# Altium PCB Linear Actuator V3.1_PcbDoc.PcbDoc
Units mm, origin at the board's own origin, x right, y up, seen from the top; angles counter-clockwise.
Board outline 73 x 17.08 mm, 2 copper layers (Top Layer, Bottom Layer); 50 components, 48 nets, 194 pads, 115 vias.
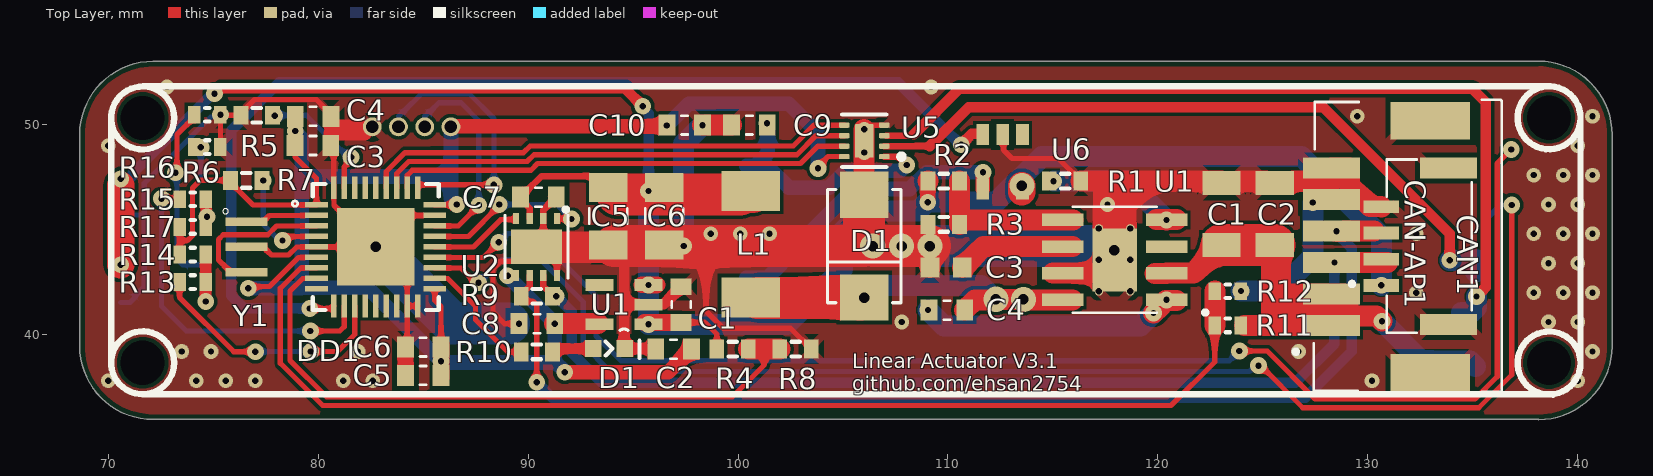
[diagram p0: Top Layer view]
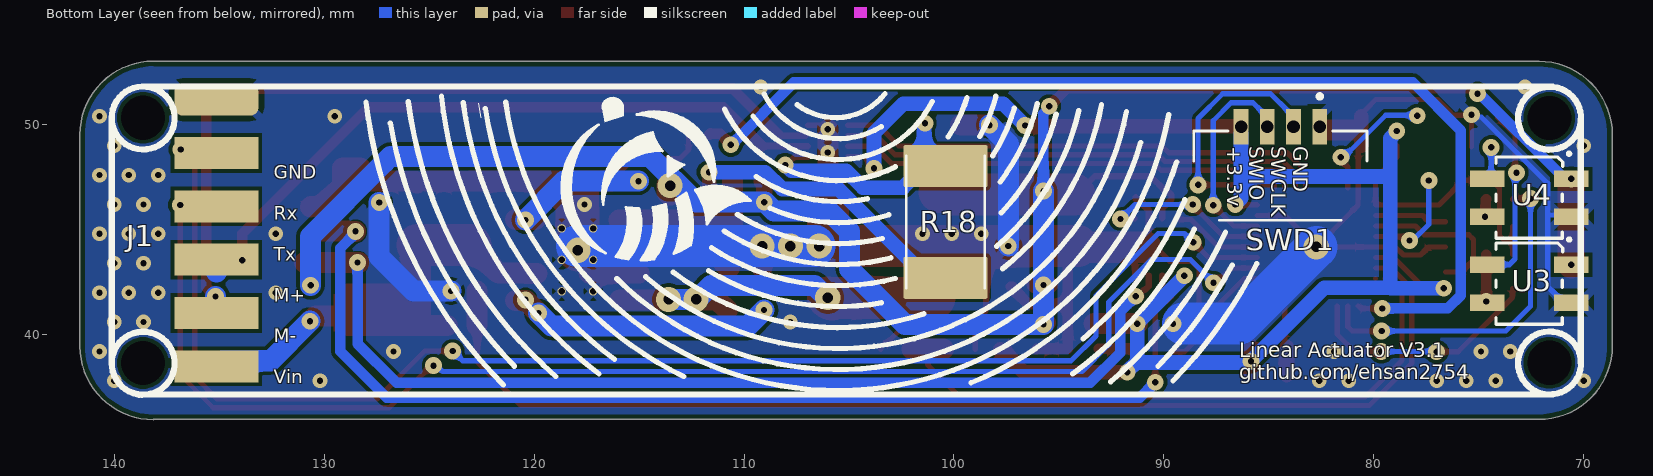
[diagram p1: Bottom Layer view, seen from below]
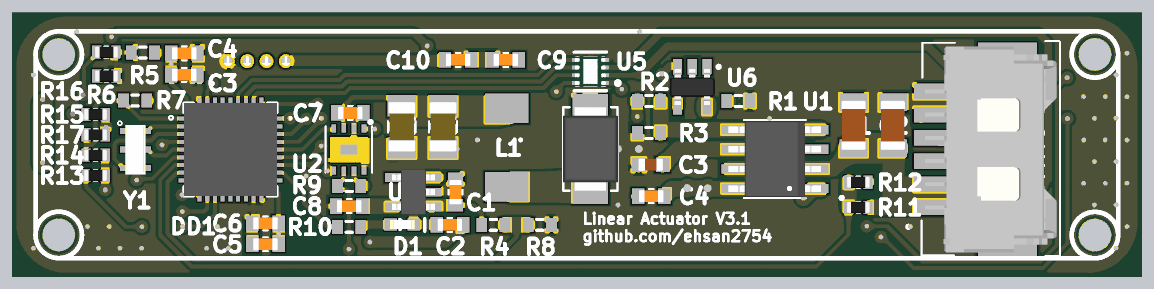
[diagram p2: 3D render of the assembled board from above, using the file's embedded part models]
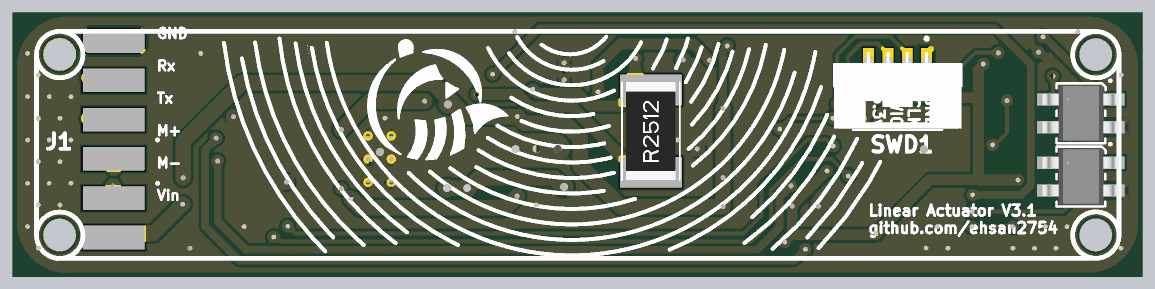
[diagram p3: 3D render of the assembled board from below, using the file's embedded part models]

## Layer stack, top to bottom
Top Solder: solder mask 0.0102, Solder Resist, Dk 3.5
Top Layer: signal copper 0.0356
Dielectric 1: dielectric 0.32, FR-4, Dk 4.8
Bottom Layer: signal copper 0.0356
Bottom Solder: solder mask 0.0102, Solder Resist, Dk 3.5

## Board outline
68.64,39.461 68.64,49.52 68.641,49.52 cw(c72.141,49.52) 72.14,53.02 138.13,53.02 138.13,53.029 cw(c138.13,49.529) 141.63,49.53 141.645,49.53 141.645,39.45 141.629,39.45 cw(c138.129,39.45) 138.13,35.95 138.13,35.96 72.14,35.96 72.14,35.961 cw(c72.14,39.461)

## Design rules (kind name [scope] priority, off if disabled: settings)
BoardOutlineClearance [All] p1: gap=0.25 ignorepadtopadclearanceinfootprint=FALSE
Clearance [All] p1: gap=0.17 ignorepadtopadclearanceinfootprint=FALSE
ComponentClearance [All] p1: gap=0.254 collisioncheckmode=3 verticalgap=2540 showdistances=FALSE
FanoutControl Fanout_SOIC [IsSOIC] p3: bgadir=Out bgaviamode=Closest fanoutstyle=Auto fanoutdirection=Alternating viagrid=0.025 // Fanout_SOIC (Default Rule)
FanoutControl Fanout_Small [(CompPinCount < 5)] p4: bgadir=Out bgaviamode=Closest fanoutstyle=Auto fanoutdirection=OutThenIn viagrid=0.025 // Fanout_Small (Default Rule)
FanoutControl Fanout_Default [All] p5: bgadir=In bgaviamode=Closest fanoutstyle=Auto fanoutdirection=Alternating viagrid=0.025 // Fanout_Default (Default Rule)
HoleSize [All] p1: absolutevalues=TRUE maxlimit=4.5 minlimit=0.3 maxpercent=80.000 minpercent=20.000
HoleToHoleClearance [All] p1: gap=0.4 allowstackedmicrovias=TRUE
MinimumSolderMaskSliver [All] p1: minsoldermaskwidth=0.15
PlaneClearance [All] p1: clearance=0.2
PlaneConnect [All] p1: planeconnectstyle=Relief reliefexpansion=0.5 reliefentries=4 reliefconductorwidth=0.2 reliefairgap=0.25
PolygonConnect PolygonConnect_1 [InNet('GND')] p1: connectstyle=Relief reliefconductorwidth=0.4 reliefentries=4 polygonreliefangle="45 Angle" airgapwidth=0.254
PolygonConnect [All] p2: connectstyle=Relief reliefconductorwidth=0.3 reliefentries=4 polygonreliefangle="90 Angle" airgapwidth=0.16
RoutingCorners [All] p1: cornerstyle=45-Degree minsetback=2.5 maxsetback=2.5
RoutingPriority [All] p1 off: routingpriority=0
RoutingVias [All] p1: holewidth=0.3 width=0.7 viastyle="Through Hole" minholewidth=0.3 minwidth=0.7 maxholewidth=0.8 maxwidth=1.2
SilkToSilkClearance [All] p1: silktosilkclearance=0
SilkToSolderMaskClearance [IsPad] p1: minsilkscreentomaskgap=0 clearancetoexposedcopper=TRUE
SolderMaskExpansion [All] p1: expansion=0.1 istentingtop=FALSE
Width [All] p1: maxlimit=5 minlimit=0.17 preferedwidth=0.3
17 further rules are at their usual default settings.

## Classes and differential pairs
component class "Linear Actuator V3.1_SchDoc": C9 C10 J1 R6 R13 R14 R15 R16 R17 R18 U3 U4 U5 U6
component class STM32F103T8: C1 C2 C3 C4 C5 C6 C7 C8 CAN1 CAN-AP1 D1 DD1 R4 R5 R7 R8 R9 R10 R11 R12 SWD1 U1 U2 Y1
component class DCDC-LMR16030: C1 C2 C3 C4 C5 C6 D1 L1 R1 R2 R3 U1

## Components (designator, comment, footprint, x,y, rotation, side; value= is the part's Value field where it differs from the comment)
C1 "GX035C104MAT2-500" *CAPC1608X90 97.29,41.43 r90 top value=0.1u
C1 "GRM31CR71H225KA88L" *CAP3216X125N 123.029,45.747 r90 top value=2.2u
C2 "GX035C104MAT2-500" *CAPC1608X90 96.93,39.31 r180 top value=0.1u
C2 "GRM31CR71H225KA88L" *CAP3216X125N 125.569,45.747 r90 top value=2.2u
C3 "GX035C104MAT2-500" *CAPC1608X90 79.753,49.01 r0 top value=0.1u
C3 "GRM188R71C105KA12D" CAPC1608X90N 109.913,43.199 r0 top value=1u
C4 "GX035C104MAT2-500" *CAPC1608X90 79.756,50.4 r0 top value=0.1u
C4 "GX035C104MAT2-500" *CAPC1608X90 109.948,41.167 r180 top value=0.1u
C5 "GX035C104MAT2-500" *CAPC1608X90 85.005,38.06 r180 top value=0.1u
C5 "GRM31CR61A476KE15L" *CAPC3216X125N 93.819,45.651 r90 top value=47u
C6 "GX035C104MAT2-500" *CAPC1608X90 85.005,39.41 r180 top value=0.1u
C6 "GRM31CR61A476KE15L" *CAPC3216X125N 96.486,45.651 r90 top value=47u
C7 "GX035C104MAT2-500" *CAPC1608X90 90.49,46.55 r0 top value=0.1u
C8 "GX035C104MAT2-500" *CAPC1608X90 90.417,40.52 r180 top value=0.1u
C9 "GX035C104MAT2-500" *CAPC1608X90 100.54,49.98 r180 top value=0.1u
C10 "GX035C104MAT2-500" *CAPC1608X90 97.46,49.98 r0 top value=0.1u
CAN1 "502585-0670" MOLEX_502585-0670 128.47,44.185 r90 top
CAN-AP1 "SM04B-GHS-TB(LF)(SN)-" JST_SM04B-GHS-TB(LF)(SN)- 132.919,44.217 r90 top
D1 "0603-LED-BLUE" *LEDM1608X80_LTE-C1906R-14(Primary) 93.85,39.335 r180 top
D1 "SK56" *SMB_P6SMB62AT3G(Primary) 106.011,44.217 r270 top
DD1 "STM32F103T8" *QFN50P600X600X100-37N 82.74,44.18 r0 top
J1 "PLS-6" "HDR Side 6 pin" 135.13,48.654 r270 bottom
L1 "IHLP2020BZER100M01" IHLP 100.601,44.307 r270 top
R1 "Res3" J1-0603 115.577,47.317 r180 top value=56k
R2 "Res3" J1-0603 109.798,47.317 r180 top value=56k
R3 "RC0603FR-0710KL" J1-0603 109.798,45.25 r0 top value=10k
R4 "RC0603FR-0710KL" J1-0603 99.74,39.31 r180 top value=10k
R5 "RC0603FR-0710KL" J1-0603 77.077,50.45 r0 top value=10k
R6 "330R" "RES 0603 (1608X06L)" 75.344,50.475 r180 top
R7 "RC0603FR-0710KL" J1-0603 76.577,47.35 r0 top value=10k
R8 "RC0603FR-0710KL" J1-0603 102.74,39.31 r180 top value=10k
R9 "Res3" J1-0603 90.417,41.83 r0 top value=120
R10 "Res3" J1-0603 90.417,39.18 r0 top value=330
R11 "180K" "RES 0603 (1608X06L)" 122.71,40.44 r0 top
R12 "10K" "RES 0603 (1608X06L)" 123.954,42.07 r180 top
R13 "10K" "RES 0603 (1608X06L)" 74.644,42.5 r180 top
R14 "10K" "RES 0603 (1608X06L)" 73.4,43.817 r0 top
R15 "10K" "RES 0603 (1608X06L)" 73.4,46.45 r0 top
R16 "330R" "RES 0603 (1608X06L)" 75.344,48.935 r180 top
R17 "10K" "RES 0603 (1608X06L)" 73.4,45.133 r0 top
R18 "resistor" RES2512 100.4,45.37 r90 bottom value="15mΩ ,1W"
SWD1 "BM04B-GHS-TBT(LF)(SN)(N)" JST_BM04B-GHS-holes 84.45,46.549 r180 bottom
U1 "SPX3819M5-L-3-3/TR" *SOT95P280X145-5N 94.57,41.43 r180 top value=3V3
U1 "LMR16030SDDAR" "*SOIC127P600X170-9N - duplicate" 117.937,43.561 r180 top
U2 "TJA1042" SOT782-1 90.4,44.18 r180 top
U3 "QRE1113GR" SMD4_2P90X3P60_ONS 72.6,42.43 r180 bottom
U4 "QRE1113GR" SMD4_2P90X3P60_ONS 72.6,46.52 r180 bottom
U5 "DRV8837DSGR" FP-DSG0008A-MFG 106.01,49.23 r180 top locked
U6 "ZXCT1022" SOT23-5 114.7,50.33 r180 top
Y1 "CSTCE8M00G55-R0" *OSC_CSTCE8M00G55-R0 76.59,44.18 r270 top

## Footprints (in the part's own frame and the unit in brackets; to place one, negate y for a bottom-side part, rotate by r counter-clockwise, add the part's x,y. Pads: shape width x height; smd on the part's side, far side on the other; paste and mask are expansions set on the pad)
*CAP3216X125N [mm]
  rect 1.15x1.82 smd: 1(-1.485,0) 2(1.485,0)
  body extent -1.6,-0.8 1.6,0.8, height 1.22
*CAPC1608X90 [mm]
  rect 0.8x1 smd: 1(-0.85,0) 2(0.85,0)
  silkscreen extent -0.15,-0.45 0.15,0.45, body extent -0.8,-0.4 0.8,0.41, height 0.88
*CAPC3216X125N [mm]
  rect 1.38x1.82 smd: 1(-1.369,0) 2(1.369,0)
  silkscreen extent -0.36,-0.9 0.36,0.9, body extent -1.6,-0.87 1.6,0.87, height 1.71
*LEDM1608X80_LTE-C1906R-14(Primary) [mm]
  rect 0.8x0.8 smd: A(0.75,0) C(-0.75,0)
  silkscreen extent -1.45,-0.38 0.16,0.45, body extent -0.8,-0.3 0.8,0.3, height 1.15
*OSC_CSTCE8M00G55-R0 [mm]
  rect 0.4x2 smd: 1(-1.2,0) 2(0,0) 3(1.2,0)
  silkscreen extent -1.83,-1.13 -1.57,-0.87, body extent -1.6,-0.65 1.6,0.65, height 1
*QFN50P600X600X100-37N [mm]
  rect 1.08x0.26 smd: 1(-2.815,2) 2(-2.815,1.5) 3(-2.815,1) 4(-2.815,0.5) 5(-2.815,0) 6(-2.815,-0.5) 7(-2.815,-1) 8(-2.815,-1.5) 9(-2.815,-2) 19(2.815,-2) 20(2.815,-1.5) 21(2.815,-1) 22(2.815,-0.5) 23(2.815,0) 24(2.815,0.5) 25(2.815,1) 26(2.815,1.5) 27(2.815,2)
  rect 0.26x1.08 smd: 10(-2,-2.815) 11(-1.5,-2.815) 12(-1,-2.815) 13(-0.5,-2.815) 14(0,-2.815) 15(0.5,-2.815) 16(1,-2.815) 17(1.5,-2.815) 18(2,-2.815) 28(2,2.815) 29(1.5,2.815) 30(1,2.815) 31(0.5,2.815) 32(0,2.815) 33(-0.5,2.815) 34(-1,2.815) 35(-1.5,2.815) 36(-2,2.815)
  rect 3.7x3.7 smd: 37(0,0)
  silkscreen extent -3.97,-3 3,3, body extent -3,-3 3,3, height 1
*SMB_P6SMB62AT3G(Primary) [mm]
  rect 2.2x2.3 smd: A(-2.45,0) C(2.45,0)
  silkscreen extent -2.7,-1.75 2.7,1.75, body extent -2.72,-1.78 2.72,1.78, height 2.49
"*SOIC127P600X170-9N - duplicate" [mm]
  rect 1.97x0.6 smd: 1(-2.475,1.905) 2(-2.475,0.635) 3(-2.475,-0.635) 4(-2.475,-1.905) 5(2.475,-1.905) 6(2.475,-0.635) 7(2.475,0.635) 8(2.475,1.905)
  round 0.4 hole 0.3: 9(-0.75,1.5) 9(-0.75,0) 9(-0.75,-1.5) 9(0.75,1.5) 9(0.75,0) 9(0.75,-1.5)
  rect 2.13x3 smd: 9(0,0)
  silkscreen extent -4.42,-2.52 2,2.6, body extent -3,-2.45 3,2.45, height 1.69
*SOT95P280X145-5N [mil]
  rect 52x22 smd: 1(-46,37) 2(-46,0) 3(-46,-37) 4(46,-37) 5(46,37)
  silkscreen extent -7,46 7,48, body extent -55,-57 55,57, height 57
CAPC1608X90N [mm]
  rect 0.89x0.93 smd: 1(-0.77,0) 2(0.77,0)
  body extent -0.8,-0.4 0.8,0.4, height 0.9
FP-DSG0008A-MFG [mm]
  rrect40% 0.5x0.25 smd paste+0 mask+0: 1(-0.95,0.75) 2(-0.95,0.25) 3(-0.95,-0.25) 4(-0.95,-0.75) 5(0.95,-0.75) 6(0.95,-0.25) 7(0.95,0.25) 8(0.95,0.75)
  rrect11% 0.9x1.6 smd paste-1000 mask+0: 9(0,0)
  silkscreen extent -1.9,-1.25 1.05,1.25, body extent -1.3,-1.15 1.3,1.15, height 0.25
"HDR Side 6 pin" [mm]
  rrect50% 1.524x4 smd: 1(-2.54,0)
  rect 1.524x4 smd: 2(0,0) 3(2.54,0) 4(5.08,0) 5(7.62,0) 6(10.16,0)
IHLP [mil]
  rect 75x110 smd: 1(-100,0) 2(100,0)
  body extent -100,-100 100,100, height 79
J1-0603 [mm] "Chip Resistor, Body 1.6x0.8mm, IPC High Density"
  rect 0.7x0.9 smd: 1(-0.75,0) 2(0.75,0)
  silkscreen extent -0.2,-0.35 0.2,0.35, body extent -0.85,-0.48 0.85,0.48, height 0.9
JST_BM04B-GHS-holes [mm]
  rect 0.7x1.7 / inner rect 0.6x1.7 / far side round 0.9 hole 0.6: 1(1.875,3.35) 2(0.625,3.35) 3(-0.625,3.35) 4(-1.875,3.35)
  silkscreen extent -4.13,-1.1 4.13,4.9, body extent -4.12,-1.02 4.12,3.93, height 4.15
JST_SM04B-GHS-TB(LF)(SN)- [mm]
  rect 0.6x1.7 smd: 1(-1.875,2.275) 2(-0.625,2.275) 3(0.625,2.275) 4(1.875,2.275)
  rect 1x2.7 smd: SH1(-3.725,-0.925) SH2(3.725,-0.925)
  silkscreen extent -4.13,-2.02 4.13,3.77, body extent -4.06,-2.16 4.19,2.69, height 4.35
MOLEX_502585-0670 [mm]
  rect 1x2.7 smd: 1(-3.75,0.2) 2(-2.25,0.2) 3(-0.75,0.2) 4(0.75,0.2) 5(2.25,0.2) 6(3.75,0.2)
  rect 1.8x3.8 smd: P1(-6,-4.5) P2(6,-4.5)
  silkscreen extent -6.9,-7.9 7,2, body extent -6.65,-7.68 6.65,0.82, height 6.41
RES2512 [mm]
  rrect7% 2x4 smd: 1(-2.66,0) 2(2.66,0)
  silkscreen extent -3.15,-1.87 3.15,1.87, body extent -3.17,-1.6 3.18,1.6, height 0.55
"RES 0603 (1608X06L)" [mm] "Chip Resistor, 2-Leads, Body 1.6x0.8mm, IPC High Density _ (0.063W)"
  rect 0.6x0.85 smd: 1(0,0) 2(1.244,0)
  silkscreen extent 0.52,-0.33 0.72,0.33, body extent -0.14,-0.38 1.38,0.38, height 0.45
SMD4_2P90X3P60_ONS [mm]
  rect 1.651x0.787 smd paste+0 mask+0: 1(2,0.9) 2(-2,0.9) 3(-2,-0.9) 4(2,-0.9)
  silkscreen extent -1.57,-1.93 1.98,2.18, body extent -2.47,-1.8 2.48,1.8, height 1.88
SOT23-5 [mm]
  round 0.4 on Top Overlay: 1(0.4,0.8)
  rect 0.6x1 smd: 1(1.15,0.8) 2(2.1,0.8) 3(3.05,0.8) 4(3.05,3.4) 5(1.15,3.4)
  body extent 0.64,0.93 3.56,3.27, height 1
SOT782-1 [mm]
  rect 0.3x0.525 smd: 1(-0.975,-1.362) 2(-0.325,-1.362) 3(0.325,-1.362) 4(0.975,-1.362) 5(0.975,1.362) 6(0.325,1.362) 7(-0.325,1.362) 8(-0.975,1.362)
  rect 2.45x1.65 smd paste-2: P$9(0,0)
  silkscreen extent -1.5,-1.88 1.5,1.5, body extent -1.52,-1.52 1.52,1.52, height 0.85

## Part data
C1 C2 C3 C4 C4 C5 C6 C7 C8 C9 C10: "Cap Thin Film 0.1uf 50v 0603", Package="0603 AVX", MF=AVX, Pacage Metric=1608, SnapEDA_Link=https://www.snapeda.com/parts/GX035C104MAT2-500/AVX/view-part/?ref=snap, Type=SMD
  C1 C2: MP=GX035C104MAT2-500
  C3 C4 C4 C5 C6 C7 C8 C9 C10: MP="GX035C104MAT2-500 or CL10B104JB8NNNC"
C1 C2: "1206 2.2 uF 50 V В±10% Tolerance X7R SMT Multilayer Ceramic Capacitor", Package="1206 Murata", MF="Murata Electronics", MP=GRM31CR71H225KA88L, SnapEDA_Link=https://www.snapeda.com/parts/GRM31CR71H225KA88L/Murata%20Electronics%20North%20America/view-part/?ref=snap, Type=SMD
C3: "SMD Capacitor X7R(EIA) with Capacitance: 1.0uF Tol. 10%. Rated Voltage: 16Vdc", Package=0603, ChipDip_Link=https://www.chipdip.ru/product/grm188r71c105ka12d, HelpURL=https://static.chipdip.ru/lib/428/DOC005428493.pdf, MF="Murata Electronics", MP=GRM188R71C105KA12D, Pacage Metric=1608, SnapEDA_Link=https://www.snapeda.com/parts/GRM188R71C105KA12D/Murata%20Electronics%20North%20America/view-part/228340/?ref=snap, Type=SMD
C5 C6: "Multilayer Ceramic Capacitor, GRM Series, 47 - F, - 10%, X5R, 10 V, 1206 [3216 Metric]", Package="1206 Murata Electronics", MF="Murata Electronics", MP=GRM31CR61A476KE15L, SnapEDA_Link=https://www.snapeda.com/parts/GRM31CR61A476KE15L/Murata%20Electronics%20North%20America/view-part/?ref=snap, Type=SMD
CAN1: "1.50mm Pitch, CLIK-Mate PCB Receptacle, Single Row, Surface Mount, Right-Angle, Tin Plating, Positive Lock, 6 Circuits, Natural", Package=None, MF=Molex, MP=502585-0670, SnapEDA_Link=https://www.snapeda.com/parts/502494-0670/Molex/view-part/?ref=snap, System=Connector, Type=SMD
CAN-AP1: "Connector Header Surface Mount, Right Angle 4 position 0.049 _1.25mm_", Package=None, ChipDip_Link=https://www.chipdip.ru/product/sm04b-ghs-tb-lf-sn-gh-1.25mm-header-side-ent, HelpURL=http://www.farnell.com/datasheets/2082975.pdf, MF="JST Sales", MP=SM04B-GHS-TB(LF)(SN), SnapEDA_Link=https://www.snapeda.com/parts/SM04B-GHS-TB%28LF%29%28SN%29-/JST%20Sales%20America%20Inc./view-part/2759740/?ref=snap, System=Connector
D1: library part LTE-C1906R-14, "LED IrLED Chip LED 2-Pin SMD T/R", Package="0603 Lite-On", MP=0603-LED-BLUE, SnapEDA_Link=https://www.snapeda.com/parts/LTE-C1906R-14/Lite-On%20Inc./view-part/?ref=snap, Type=SMD
D1: "Диод Шоттки 5А 60В [SMB / DO-214AA]", Package="DO-214 Littelfuse", ChipDip_Link=https://www.chipdip.ru/product/sk56, MF="Littelfuse Inc.", MP=SK56, SnapEDA_Link=https://www.snapeda.com/parts/P6SMB62AT3G/Littelfuse%20Inc./view-part/?ref=snap, Type=SMD
DD1: "STM32F103T8U6, Микроконтроллер 32BIT ARM 64K FLASH [VFQFPN-36]", Package=VFQFPN-36, ChipDip_Link=https://www.chipdip.ru/product/stm32f103t8u6-2, HelpURL=http://www.st.com/stonline/products/literature/ds/13587.pdf, MF=STM, MP=STM32F103T8U6, SnapEDA_Link=https://www.snapeda.com/parts/STM32F103T8U6TR/STMicroelectronics/view-part/?ref=search&t=STM32F103T8U6, Type=SMD
J1: "PLS-6 (DS1021-1x6), Вилка штыревая 2.54мм 1x6 прямая тип1", ChipDip_Link=https://www.chipdip.ru/product/pls-6, Instructions=DNP, MP=PLS-6, Type=SMD
L1: "10ÂµH Shielded Molded Inductor 2.3A 199mOhm Max Nonstandard", Package="Nonstandard Vishay", ChipDip_Link=https://www.chipdip.ru/product/ihlp2020bzer100m11-inductor-ihlp-smd-2020-10, HelpURL=http://www.vishay.com/docs/34253/ihlp-2020bz-01.pdf, MF="Vishay Dale", MP=IHLP2020BZER100M01, SnapEDA_Link=https://www.snapeda.com/parts/IHLP2020BZER100M01/Vishay%20Dale/view-part/44808/?ref=snap, Type=SMD
R1 R2 R10: "Resistor", Package=R0603, Pacage Metric=1608, Type=SMD
  R1 R2: ChipDip_Link=https://www.chipdip.ru/product0/9000079754, HelpURL=https://www.chipdip.ru/product0/9000079754, MP=RC0603FR-0756KL
  R10: ChipDip_Link=https://www.chipdip.ru/product0/9000079628, HelpURL=https://www.chipdip.ru/product0/9000079628, MP=RC0603FR-07330RL
R3 R4 R5 R7 R8: "10 kOhms 1 0.1 W 1 10 W Chip Resistor 0603 1608 Metric Thick Film", Package=R0603, ChipDip_Link=https://www.chipdip.ru/product0/9000079736, HelpURL=https://www.chipdip.ru/product0/9000079736, MF="Yageo or NXP", MP="10K 1% 0603", Pacage Metric=1608, SnapEDA_Link=https://www.snapeda.com/parts/RC0603FR-0710KL/Yageo/view-part/?ref=dk&t=RC0603FR-0710KL&con_ref=None, Type=SMD
R6 R11 R12 R13 R14 R15 R16 R17: library part Resistor, "Resistor", Power="1/8 W", Tolerance=5%
R9: "120 Ohms 1 0.1 W 1 10 W Chip Resistor 0603 1608 Metric Thick Film", Package=R0603, ChipDip_Link=https://www.chipdip.ru/product0/9000079618, HelpURL=https://www.chipdip.ru/product0/9000079618, MP=RC0603FR-07120RL, Pacage Metric=1608, Type=SMD
R18: "Resistor", LatestRevisionDate=17-Jul-2002, LatestRevisionNote="Re-released for DXP Platform.", PackageReference=AXIAL-0.4, Published=8-Jun-2000, Publisher="Altium Limited"
SWD1: "Conn Shrouded Header HDR 4 POS 1.25mm Solder ST SMD Reel", Package=None, Instructions="Do not install", MF="JST Sales", MP=SM04B-GHS-TB(LF)(SN), SnapEDA_Link=https://www.snapeda.com/parts/BM04B-GHS-TBT%28LF%29%28SN%29%28N%29/JST%20Sales%20America%20Inc./view-part/?ref=snap, System=Connector, Type=SMD
U1: library part SPX3819M5-L, "Low Dropout Voltage Regulator, Adjustable 0.5A, В±1%, 2.5 to 16 Vin, 5-Pin SOT-23", Package="SOT-23-5 Exar", ChipDip_Link=https://www.chipdip.ru/product1/8003455237, HelpURL=http://www.farnell.com/datasheets/2614478.pdf, MF="MaxLinear, Inc.", MP=SPX3819M5-L-3-3/TR, SnapEDA_Link=https://www.snapeda.com/parts/SPX3819M5-L/MaxLinear%2C%20Inc./view-part/?ref=snap, Type=SMD
U1: "LMR16030SDDAR, Conv DC-DC 4.3V to 60V Step Down Single-Out 1V to 50V 3A Automotive 8-Pin HSOP EP T/R", Package="PowerSOIC-8 Texas Instruments", ChipDip_Link=https://www.chipdip.ru/product1/8003448566, HelpURL=https://www.ti.com/lit/ds/symlink/lmr16030.pdf, MF="Texas Instruments", MP=LMR16030SDDAR, SnapEDA_Link=https://www.snapeda.com/parts/TPS54560DDA/Texas%20Instruments/view-part/?ref=snap, Type=SMD
U2: "1/1 Transceiver Half CANbus 8-SO", Package="VDFN-8 NXP USA", ChipDip_Link=https://www.chipdip.ru/product1/8002840332, HelpURL=https://static.chipdip.ru/lib/583/DOC001583059.pdf, MF="NXP USA", MP=TJA1042, SnapEDA_Link=https://www.snapeda.com/parts/TJA1042/NXP%20USA%20Inc./view-part/900919/?ref=snap, Type=SMD
U3 U4: "No Description Available", Built_By="Ehsan Shaghaei", ChipDip_Link=https://www.chipdip.ru/product/qre1113gr-fairchild, ComponentLink1Description="New link", Copyright="Copyright (C) 2018 Accelerated Designs. All rights reserved", Manufacturer_Part_Number=QRE1113GR, RefDes=RefDes, SourceLibrary=ON_Semiconductor_2019-12-30, Type=DEV, Vendor="ON Semiconductor"
U5: library part CMP-04915-000004-1, "IC MOTOR DRIVER PAR 8WSON", Ambient Temperature Range High=+85°C, Ambient Temperature Range Low=-40°C, Manufacturer="Texas Instruments", Max Junction Temp=+150°C, Max Supply Voltage=7V, Min Supply Voltage=1.8V, Nominal Supply Current=300-700uA, Output Current=1.8A, Output Voltage=0-11V, Package=DSG0008A, Switching Frequency=0-250kHz, Temperature="-40°C to +85°C", Automotive=No, Category=IC, ComponentLink2Description=ChipDip_Link, ComponentLink2URL=https://www.chipdip.ru/product0/8004320325, ComponentLink3Description=HelpURL, ComponentLink3URL=http://www.ti.com/lit/ds/symlink/drv8837.pdf, Device Class L1="Integrated Circuits (ICs)", Device Class L2="Power Management ICs", Device Class L3="Motor Drivers", Digikey Description="IC MOTOR DRIVER PAR 8WSON", HEIGHT=0.8mm, Lead Free=Yes, Manufacturer Part Number=DRV8837DSGR, Motor Type=Brushed, Mouser Description="Motor / Motion / Ignition Controllers & Drivers 1.8A Low Vltg Brush DC Motor Driver", Number Of Outputs=2, Octopart=https://octopart.com/drv8837dsgr-texas+instruments-23786726, RoHS=TRUE, Standoff Height=0mm, Temperature Range High=+85°C, Temperature Range Low=-40°C
Y1: "Ceramic Resonator 8MHz ??0.5% _Tol_ ??0.2% _Stability_ 33pF 40Ohm 3-Pin CSMD T/R", Package="SMD-3 Murata", ChipDip_Link=https://www.chipdip.ru/product1/8001783721, HelpURL=https://www.murata.com/en-eu/api/pdfdownloadapi?cate=&partno=CSTCE8M00G55-R0, MF=Murata, MP=CSTCE8M00G55-R0, SnapEDA_Link=https://www.snapeda.com/parts/CSTCE8M00G55-R0/Murata%20Electronics%20North%20America/view-part/?ref=snap, Type=SMD
U6: ChipDip_Link=https://www.chipdip.ru/product/zxct1022e5ta-current-sense-monitor-2.5, HelpURL=https://static.chipdip.ru/lib/465/DOC012465896.pdf

## Free pads (board coordinates)
  round 1.2 hole 2.1: 1(71.64,50.32) 2(71.64,38.661) 3(138.63,38.65) 4(138.63,50.33)

## Via types
v1: diameter 0.8, hole 0.3, Top Layer to Bottom Layer, tented both sides, 63 vias
v2: diameter 0.7, hole 0.3, Top Layer to Bottom Layer, tented both sides, 43 vias
v3: diameter 1.2, hole 0.5, Top Layer to Bottom Layer, tented both sides, 9 vias

## Nets (pads, with @x,y where several pads share a name; then routed paths per layer and width w, separated by ;. In a path a pad name is that pad's centre, name@x,y a point inside that pad or via, vN(x,y) a via of type N, cw(c..) or ccw(c..) an arc to the next point about the centre after c; other vN are vias at no path point)
3.3: C2.1@97.78,39.31 C3.1@78.903,49.01 C4.1@78.906,50.4 C5.1@85.855,38.06 C6.1@85.855,39.41 C8.1 C10.1 DD1.1 DD1.6 DD1.19 DD1.27 R7.1 R14.1 R17.1 SWD1.4 U1.5@93.402,40.49 U2.5 U5.8 | length 93.1
  Top Layer w0.25: R14.1@73.4,43.832 73.4,44.482 ; R17.1@73.4,45.148 R17.1 73.4,44.482 ; v1(76.67,42.21) 76.75,42.29 77.687,42.29 79.072,43.675 79.92,43.675 DD1.6 ; C3.1@78.903,49.01 78.903,48.467 79.925,47.445 DD1.1 76.896,46.18 75.827,47.25 R7.1 74.38,47.35 74.01,46.98 74.01,44.71 73.782,44.482 73.4,44.482 ; DD1.19 85.555,41.635 85.855,41.335 C6.1@85.855,39.41 ; DD1.27 85.56,46.185 86.585,46.185 v1(86.6,46.2) ; v1(103.81,47.92) 103.81,48 104.29,48.48 U5.8
  Top Layer w0.7: v1(85.855,38.735) C6.1@85.855,39.41 ; SWD1.4 86.346,49.92 C10.1@96.6,49.92 ; v1(91.75,38.21) 96.68,38.21 97.63,39.16 97.73,39.16 97.78,39.21 C2.1@97.78,39.31 ; v1(96.61,49.96) C10.1
  Top Layer w1: v1(91.267,40.52) U1.5@93.34,40.52
  Bottom Layer w0.7: v1(76.67,42.21) 79.2,42.21 79.22,42.23 ; v1(78.905,49.705) 78.905,49.678 79.225,49.357 79.225,47.41 ; SWD1.4@86.325,49.599 86.325,47.531 ; v1(86.6,46.2) 86.6,46.227 86.325,46.502 86.325,47.531 ; v1(89.025,42.805) 89.025,42.784 91.267,40.542 v1(91.267,40.52) 91.267,38.73 91.327,38.67 ; v1(91.75,38.21) 91.75,38.237 91.7,38.287 91.7,38.297 91.327,38.67 ; v1(96.61,49.96) 97.65,51 102.41,51 103.81,49.6 v1(103.81,47.92) ; 79.22,42.23 82.36,42.23 v1(85.855,38.735) 85.882,38.735 85.947,38.67 91.327,38.67 ; 79.22,42.23 79.225,42.236 79.225,47.41 ; 79.225,47.41 79.347,47.531 86.325,47.531
+5: C1.1@97.29,40.58 C5.2@93.819,47.02 C6.2@96.486,47.02 C7.1 CAN-AP1.1 L1.1 R2.2 R4.2 U1.1@95.738,40.49 U1.3@95.738,42.37 U2.3 U3.1 U4.1 U6.5 | length 104
  Top Layer w0.25: C1.1@97.29,40.58 98.427,40.58 98.99,40.017 R4.2
  Top Layer w0.3: U2.3 90.075,46.024 89.899,46.2 89.89,46.2 89.64,46.45 C7.1 89.64,46.65 89.89,46.9 89.99,46.9 90.64,47.55 93.289,47.55 C5.2@93.819,47.02
  Top Layer w0.5: v1(75.06,51.47) 75.141,51.47 75.411,51.74 94.6,51.74 v1(95.46,50.88)
  Top Layer w0.7: v1(109.04,46.31) R2.2@109.04,47.309
  Top Layer w0.8: U1.3@95.43,42.38 96.14,42.38 U1.3@96.133,42.373 ; U1.1@95.53,40.58 C1.1@97.29,40.58 ; v1(95.738,42.37) U1.3@96.13,42.37
  Top Layer w1: v1(95.738,46.838) C6.2@95.88,46.98 ; R2.2@109.04,47.309 R2.2
  Top Layer w1.3: v1(70.6,43.33) v1@70.6,47.12 ; U6.5@113.52,46.794 v3(113.52,47.1)
  Top Layer w2: C5.2@94.25,46.68 C6.2@95.738,46.68 ; C6.2@95.88,46.68 100.085,46.68 100.204,46.799 L1.1@100.679,46.799
  Bottom Layer w0.5: v1(70.6,47.42) 71.032,47.42 71.175,47.564 71.175,47.691 74.897,51.413 75.003,51.413 v1(75.06,51.47) ; v1(95.46,50.88) 95.46,50.799 95.738,50.52 v1(95.738,46.838)
  Bottom Layer w1: v1(95.738,46.838) v1(95.738,42.37) v1(95.738,40.49) 102.34,40.49 104.98,43.13 104.98,44.912 105.958,45.89 108.573,45.89 108.993,46.31 v1(109.04,46.31) 112.29,46.31 114.467,48.487 126.843,48.487 127.136,48.194 130.644,44.686 v1(130.644,42.35)
ADC_5V: DD1.8 R4.1 R8.2 | length 30.6
  Top Layer w0.25: DD1.8@79.467,42.68 79.264,42.68 78.663,42.078 78.663,38.771 80.394,37.04 99.74,37.04 101.24,38.54 101.24,39.31 ; DD1.8@79.92,42.675 DD1.8
  Top Layer w1: R4.1 101.24,39.31 R8.2
ADC_CUR: DD1.10 U6.3 | length 51.3
  Top Layer w0.25: v1(79.6,41.25) 80.625,41.25 DD1.10
  Top Layer w0.5: v1(110.63,49.05) 111.14,49.56 111.6,49.56 111.6,49.59 111.65,49.54 U6.3
  Bottom Layer w0.5: v1(79.6,41.25) 76.471,41.25 75.85,41.871 75.85,49.72 78.15,52.02 107.62,52.02 110.59,49.05 v1(110.63,49.05)
ADC_VIN: DD1.7 R11.1 R12.2 | length 55.3
  Top Layer w0.25: DD1.7 79.171,43.18 78.2,42.209 78.2,38.64 80.22,36.62 120.62,36.62 122.71,38.71 R11.1
  Top Layer w1: R11.1 122.71,41.47 R12.2
BOOT0: DD1.35 R5.2 | length 6.2
  Top Layer w0.25: R5.2 77.916,50.45 v1(77.936,50.43) ; DD1.35 81.24,47.972 81.57,48.302 v1(81.57,48.451)
  Bottom Layer w0.25: v1(77.936,50.43) 77.956,50.45 79.433,50.45 81.432,48.451 v1(81.57,48.451)
CAN_H: CAN1.3 CAN-AP1.2 R9.2 U2.7 | length 48.5
  Top Layer w0.3: U2.7 90.725,42.306 90.901,42.13 90.967,42.13 91.167,41.93 R9.2
  Top Layer w0.5: R9.2 v1(91.34,41.83)
  Top Layer w1: CAN1.3@128.345,43.435 CAN1.3@128.41,43.435 ; v1(128.41,43.437) CAN1.3@128.41,43.435 ; CAN-AP1.2@130.928,43.435 128.87,43.435 CAN1.3@128.41,43.435
  Bottom Layer w0.5: v1(91.34,41.83) 92.087,41.083 92.087,39.133 93.52,37.7 126.55,37.7 128.41,39.56 v1(128.41,43.437)
CAN_L: CAN1.4 CAN-AP1.3 R9.1 U2.6 | length 53.6
  Top Layer w0.25: R9.1 89.667,41.81 89.892,41.585 90.255,41.585 90.41,41.43 v1(90.41,37.735)
  Top Layer w0.3: R9.1 89.667,41.93 89.867,42.13 89.899,42.13 90.075,42.306 U2.6
  Top Layer w1: v1(128.51,44.92) 128.855,44.92 128.87,44.935 CAN-AP1.3@130.294,44.935
  Bottom Layer w0.5: v1(90.41,37.735) 90.41,37.73 91.15,36.99 127.02,36.99 129.23,39.2 129.23,44.119 128.51,44.839 v1(128.51,44.92)
CAN_RXD: DD1.23 U2.4 | length 4.5
  Top Layer w0.25: DD1.23 87.397,44.18 88.703,45.486 89.4,45.486 89.425,45.511 U2.4
CAN_TXD: DD1.24 U2.1 | length 8.2
  Top Layer w0.25: DD1.24 87.153,44.68 88.628,46.155 v1(88.628,46.2) ; U2.1 91.391,45.526 92.054,45.526 v1(92.07,45.51)
  Bottom Layer w0.25: v1(88.628,46.2) 91.38,46.2 v1(92.07,45.51)
EN: DD1.31 U5.5 | length 23.5
  Top Layer w0.25: DD1.31 83.245,47 83.245,47.775 84.14,48.67 85.34,48.67 89.782,48.67 90.102,48.99 102.629,48.99 103.619,49.98 U5.5
ENC1: DD1.11 R15.1 | length 16
  Top Layer w0.25: v1(72.54,46.48) 73.37,46.48 R15.1 ; v1(79.63,40.17) 81.03,40.17 81.24,40.38 DD1.11
  Bottom Layer w0.25: v1@72.54,46.18 72.54,41.35 73.72,40.17 v1(79.63,40.17)
ENC2: DD1.12 R13.2 | length 11.5
  Top Layer w0.25: R13.2@73.4,42.2 73.4,41.77 75.98,39.19 v1(77.01,39.19) ; v1(79.644,39.2) 80.93,39.2 81.74,40.01 DD1.12
  Bottom Layer w0.25: v1(77.01,39.19) 77.02,39.2 v1(79.644,39.2)
FB: R2.1 R3.2 U1.5@115.462,45.466 | length 7.6
  Top Layer w1: R2.1 R3.2 110.764,45.466 115.462,45.466 U1.5@115.95,45.466
GND: C1.2 C2.2 C3.1@109.143,43.199 C3.2@80.603,49.01 C4.2@80.606,50.4 C5.1@93.819,44.282 C5.2@84.155,38.06 C6.1@96.486,44.282 C6.2@84.155,39.41 C7.2 C8.2 C9.2 C10.2 CAN1.5 CAN1.6 CAN1.P1 CAN1.P2 CAN-AP1.4 CAN-AP1.SH1 CAN-AP1.SH2 D1.A@106.011,46.667 D1.C@94.6,39.335 DD1.5 DD1.17 DD1.18 DD1.26 DD1.36 DD1.37 J1.1 R1.1 R3.1 R5.1 R6.1 R8.1 R12.1 R16.1 SWD1.1 U1.2@95.738,41.43 U1.7 U1.9 U2.2 U2.8 U2.P$9 U3.4 U4.4 U5.4 U5.9 U6.2 Y1.2 | length 163.5
  Top Layer w0.25: R16.1 75.344,50.45 v1(75.344,50.475) 75.369,50.45 R5.1 76.327,50.55 76.972,51.195 79.911,51.195 80.331,50.775 80.606,50.5 C4.2@80.606,50.4 ; Y1.2 77.39,44.18 77.78,43.79 78.593,43.79 78.983,44.18 DD1.5 v3(82.74,44.18) ; C3.2@80.74,48.847 DD1.36 80.745,46.99 80.745,46.447 80.76,46.432 80.76,46.16 81.015,45.905 81.159,45.762 v3(82.74,44.18) ; C6.2@84.155,39.41 84.24,39.495 DD1.17 ; DD1.18 DD1.17 ; DD1.26 84.24,45.68 v3(82.74,44.18) ; v1(89.567,40.52) 88.881,40.52 88.33,41.071 88.33,43.147 88.683,43.5 89.72,43.5 U2.P$9 ; 98.47,44.217 98.47,41.131 99.291,40.31 102.49,40.31 103.165,39.635 103.265,39.635 103.49,39.41 R8.1 ; U5.9@105.685,49.905 105.81,49.78 v2(106.01,49.78) ; U5.9@105.996,49.813 106.243,49.813 106.41,49.98 U5.4 ; U6.2 112.639,49.491 112.639,48.801 113.05,48.39 115.254,48.39 116.002,47.642 116.102,47.642 116.327,47.417 R1.1 ; v3(82.74,44.18) 84.24,42.68 DD1.17
  Top Layer w0.3: C7.2 91.34,46.45 91.09,46.2 90.99,46.2 90.725,45.935 U2.2 90.725,44.322 90.875,44.172 91.375,43.672 U2.8
  Top Layer w0.5: C5.1@93.819,44.282 94.039,44.282 94.104,44.217 94.479,43.842 94.479,43.622 94.571,43.53 94.571,41.459 ; D1.C@94.571,39.335 94.571,41.459 ; D1.C@94.6,39.335 96.055,39.335 C2.2@96.08,39.31 ; C1.2@97.29,42.28 97.19,42.28 97.04,42.13 97.04,42.03 96.469,41.459 95.768,41.459 95.738,41.43 95.709,41.459 94.571,41.459
  Top Layer w0.7: C3.2@80.603,49.01 80.605,49.012 80.605,49.599 82.221,49.599 ; C4.2@80.605,49.925 80.605,50.398 C4.2@80.606,50.4 ; C4.2@80.688,49.925 80.714,49.899 SWD1.1 ; C5.2@84.155,38.06 C6.2@84.155,39.41
  Top Layer w1: v1(98.31,49.98) C9.2 ; D1.A@106.01,46.668 v2(106.01,48.68) U5.9 v2(106.01,49.78) ; C3.1@109.143,43.199 v3(109.143,44.217) ; U1.7@115,42.926 U1.7 U1.9@117.372,42.926 ; R1.1 119.65,47.317 ; 118.096,46.217 118.55,46.217 119.65,47.317 ; C1.2@123.029,47.307 123.882,47.307 123.885,47.31 C2.2@125.156,47.31 ; C1.2@123.029,47.317 119.65,47.317 ; C2.2@125.569,47.232 125.644,47.307 126.422,47.307 126.432,47.317 127.377,47.317 128.238,47.317 128.27,47.285 CAN1.6 129.12,47.935 129.12,47.085 130.1,46.105 130.63,46.105 CAN-AP1.4
  Top Layer w1.5: U2.P$9@90.875,44.172 93.61,44.172 93.659,44.222 93.759,44.222 C5.1@93.819,44.282
  Top Layer w2: C5.1@94.104,44.217 98.47,44.217 v3@105.884,44.217 ; v3@106.011,44.22 D1.A@106.011,46.567 ; v3(106.42,44.22) v3(107.79,44.22) 109.14,44.22 v3(109.143,44.217) ; 117.909,46.83 117.91,46.829 v3(117.91,44.02)
  Bottom Layer w0.25: U3.4 71.032,41.53 71.3,41.799 71.3,41.877 71.72,42.297 71.72,45.7 ; U4.4 U4.4@71.032,45.62 ; U4.4@71.032,45.7 71.72,45.7 ; v1(75.344,50.475) 75.239,50.37 74.881,50.37 71.72,47.209 71.72,45.7
  Bottom Layer w1: v1(97.41,44.22) 97.41,49.08 v1(98.31,49.98) ; v1(123.96,42.08) 125.741,42.08 127.377,43.716 v1(127.377,46.298)
  Bottom Layer w2: v3(82.74,44.18) 86.39,40.53 89.093,40.53 ; v3@106.65,44.22 v3(107.79,44.22) v3@117.95,44.22
  other v2: 70,37.8 74.2,37.8 75.6,37.8 77,37.8 81.2,37.8 82.6,37.8 130.2,37.8 140,37.8 73.5,39.2 74.9,39.2 81.9,39.2 126.7,39.2 140.7,39.2 107.8,40.6 138.6,40.6 140,40.6 132.3,42 137.9,42 139.3,42 140.7,42 138.6,43.4 140,43.4 98.7,44.8 100.1,44.8 101.5,44.8 132.3,44.8 137.9,44.8 139.3,44.8 140.7,44.8 117.6,46.2 138.6,46.2 140,46.2 137.9,47.6 139.3,47.6 140.7,47.6 70,49 140,49 129.5,50.4 140.7,50.4 72.8,51.8 109.2,51.8
LED: DD1.20 R10.1 | length 5.9
  Top Layer w0.25: DD1.20 85.56,42.675 86.175,42.675 87.5,41.35 87.5,40.71 89.03,39.18 R10.1
MISO/ADC_VC: DD1.13
MOSI/ADC_MID: DD1.14
NetC3_2: C3.2@110.683,43.199 U1.6 | length 5.7
  Top Layer w1: C3.2@110.683,43.199 111.687,44.202 U1.6@115.94,44.202
NetC4_1: C4.1@110.798,41.167 D1.C@106.011,41.767 L1.2 U1.8 | length 18.5
  Top Layer w1: C4.1@110.798,41.167 111.287,41.656 v3@112.28,41.656 ; v3(112.28,41.69) 112.29,41.68 v3(113.59,41.68) ; v3@113.59,41.656 U1.8 U1.8@115.94,41.656
  Top Layer w2: L1.2@100.931,41.757 D1.C@105.794,41.757 ; D1.C@105.794,41.677 ccw(c105.794,41.984) v3(106.011,41.767)
  Bottom Layer w1: v3(106.011,41.767) 106.065,41.767 106.638,42.34 111.576,42.34 v3@112.231,41.685 ; v3@112.28,41.685 113.585,41.685 v3(113.59,41.68)
NetC4_2: C4.2@109.098,41.167 U1.1@120.412,41.656 | length 12.7
  Top Layer w1: v1(119.789,41.033) 120.376,41.62 U1.1@120.89,41.62
  Bottom Layer w1: v1(109.05,41.17) 109.81,40.41 119.166,40.41 v1(119.789,41.033)
  other v1: 120.412,41.656
NetC9_1: C9.1 R18.2 U5.1 | length 11.9
  Top Layer w0.3: v1(101.38,50.07) 101.38,49.99 C9.1 ; U5.1 107.59,48.48 v1@107.84,48.23
  Bottom Layer w0.7: R18.2 100.69,48.03 R18.2@100.801,48.03 ; v1(101.38,50.07) 101.38,50.043 101.42,50.003 101.42,48.649 R18.2@100.801,48.03 ; v1(108.038,48.08) 108.01,48.08 107.74,47.81 105.142,47.81 104.332,47 102.43,47 101.4,48.03 R18.2@100.801,48.03
NetD1_A: D1.A@93.1,39.335 R10.2 | length 2
  Top Layer w0.5: R10.2 91.167,39.23 91.267,39.33 92.95,39.33 92.955,39.335 D1.A@93.1,39.335
NetJ1_4: J1.4 U5.2 | length 34.4
  Top Layer w0.3: U5.2 109.12,48.98
  Top Layer w0.5: 109.12,48.98 110.98,50.84 127.87,50.84 133.9,44.81 v1(133.9,43.54)
  Bottom Layer w1: J1.4@135.13,42.99 135.13,43.312 134.902,43.54 v1(133.9,43.54) 135.096,43.54 J1.4
NetJ1_5: J1.5 U5.3 | length 40.5
  Top Layer w0.3: U5.3@107.06,49.48 108.31,49.48 108.38,49.55
  Top Layer w0.5: 108.38,49.55 110.54,51.71 134.97,51.71 135.614,51.066 135.614,42.263 v1(135.17,41.82)
  Bottom Layer w1: J1.5@134.46,41.06 134.934,41.06 135.17,41.296 v1(135.17,41.82)
NetR1_2: R1.2 U1.4@120.412,45.466 | length 7.1
  Top Layer w1: U1.4@119.94,45.48 U1.4@120.398,45.48 ; v1(120.412,45.466) U1.4@120.398,45.48 ; U1.4@120.88,45.48 U1.4@120.398,45.48
  Bottom Layer w1: v1(115.03,47.31) 118.568,47.31 v1(120.412,45.466)
NetR6_2: R6.2 U3.2 | length 8.4
  Top Layer w0.25: v1(73.204,47.71) 73.282,47.788 73.282,49.534 73.923,50.175 73.925,50.175 74.1,50.35 R6.2
  Bottom Layer w0.25: v1(73.204,47.71) 73.282,47.633 73.282,43.598 73.546,43.334 U3.2@74.296,43.334
NetR13_1: R13.1 R14.2 U3.3 | length 2.2
  Top Layer w0.5: v1(74.644,41.575) R13.1 R14.2
NetR15_2: R15.2 R17.2 U4.3 | length 0.9
  Top Layer w0.5: R15.2 74.675,46.42 74.675,45.65 v1(74.705,45.62)
NetR16_2: R16.2 U4.2 | length 1.6
  Bottom Layer w0.25: v1(74.414,48.92) 74.414,47.606 U4.2
NetR18_1: R18.1 U6.4 | length 14.2
  Top Layer w0.7: U6.4 111.66,46.94 111.66,47.73 v1(111.67,47.74)
  Bottom Layer w0.7: R18.1 101.4,42.71 102.05,43.36 102.05,43.488 105.502,46.94 108.18,46.94 108.57,47.33 108.589,47.33 108.999,47.74 v1(111.67,47.74)
NetU1_3: U1.3@120.412,44.196
nSLEEP: DD1.29 U5.7 | length 22
  Top Layer w0.25: DD1.29 84.245,47 84.245,47.587 84.488,47.83 84.992,47.83 ; 84.992,47.83 90.13,47.83 90.45,48.15 102.977,48.15 103.807,48.98 U5.7
OSC_IN: DD1.2 Y1.1 | length 3.5
  Top Layer w0.25: Y1.1 77.39,45.38 77.465,45.455 77.465,45.465 77.68,45.68 DD1.2
OSC_OUT: DD1.3 Y1.3 | length 7.5
  Top Layer w0.25: Y1.3 75.79,42.98 75.715,43.055 75.715,43.095 75.25,43.56 75.25,44.53 75.48,44.76 77.597,44.76 78.017,45.18 DD1.3
PH: DD1.30 U5.6 | length 22.7
  Top Layer w0.25: DD1.30 83.745,47 83.745,47.681 84.314,48.25 85.166,48.25 89.956,48.25 90.276,48.57 102.803,48.57 103.713,49.48 U5.6
PWM2C: DD1.9
PWM3B: DD1.32
PWM3C: DD1.15
RX: DD1.22 J1.2 | length 67.4
  Top Layer w0.25: DD1.22 87.88,43.68 v1(88.605,44.405) ; v1(123.88,39.22) 125.21,39.22 127.49,36.94 135.106,36.94 136.159,37.992 136.159,48.149 v1(136.83,48.82)
  Bottom Layer w0.25: v1(88.605,44.405) 88.611,44.405 89.026,44.82 90.27,44.82 93.24,41.85 93.24,39.94 94.42,38.76 123.4,38.76 123.86,39.22 v1(123.88,39.22)
SCL/PWM4A: DD1.33
SDA/PWM4B: DD1.34
STM_NRST: DD1.4 R7.2 | length 5
  Top Layer w0.25: v1(78.305,44.485) 78.454,44.485 78.649,44.68 DD1.4
  Bottom Layer w0.25: v1(77.38,47.34) 77.38,45.262 78.156,44.485 v1(78.305,44.485)
SWDIO: DD1.25 SWD1.3 | length 10.5
  Top Layer w0.25: DD1.25 86.67,45.18 v1(87.65,46.16)
  Bottom Layer w0.25: SWD1.3@85.075,49.599 85.075,50.399 85.3,50.624 85.334,50.624 85.754,51.044 86.797,51.044 87.65,50.191 v1(87.65,46.16)
SWLK: DD1.28 SWD1.2 | length 12.4
  Top Layer w0.25: DD1.28 84.74,47.13 84.745,47.135 88.026,47.135 88.041,47.15 88.355,47.15 v1(88.37,47.135)
  Bottom Layer w0.25: SWD1.2@83.825,50.399 84.05,50.624 84.074,50.624 84.925,51.475 87.195,51.475 88.37,50.3 v1(88.37,47.135)
TX: DD1.21 J1.3 | length 66.6
  Top Layer w0.25: DD1.21 86.791,43.18 87.501,42.47 v1(87.635,42.47) ; v1(124.79,38.525) 124.895,38.525 126.9,36.52 135.28,36.52 136.854,38.094 v1(136.854,46.18)
  Bottom Layer w0.25: v1(87.635,42.47) 88.745,43.58 90.593,43.58 92.632,41.541 92.632,39.518 93.905,38.245 124.361,38.245 124.641,38.525 v1(124.79,38.525) ; J1.3@135.63,45.49 136.32,46.18 v1(136.854,46.18)
VERSION: DD1.16
Vin: C1.1@123.029,44.262 C2.1@125.569,44.262 CAN1.1 CAN1.2 J1.6 R11.2 U1.2@120.412,42.926 | length 25.4
  Top Layer w1: U1.2@119.868,42.925 U1.2@120.41,42.925 ; U1.2@120.412,42.926 121.693,42.926 C1.1@123.029,44.262 ; R11.2@124.129,40.435 CAN1.1 CAN1.1@128.87,40.435 ; C2.1@125.59,44.234 125.753,44.234 125.8,44.187 125.8,42.64 ; 125.8,40.72 125.8,41.91 125.825,41.935 CAN1.2 CAN1.2@128.87,41.935 ; 127.87,41.2 128.176,40.894 130.416,40.894 v1(130.67,40.64)
  Top Layer w2: C1.1@123.029,44.262 C2.1@125.562,44.262
  Bottom Layer w1: v1(130.67,40.64) 132.554,38.756 134.868,38.756 J1.6
pads on no net: U1.4@93.402,42.37 U6.1

## Polygon pours and split planes (outlines as drawn)
GND on Bottom Layer "GND_L02_P001" (solid, remove dead copper, pour order 1): 69.47,55.37 150.69,55.37 150.69,29.24 65.99,29.24 65.99,55.98
GND on Top Layer "GND_L01_P000" (solid, remove dead copper, pour order 0): 63.76,59 144.98,59 144.98,32.87 60.28,32.87 60.28,59.61

## Other copper
Top Layer:
  rectangle net 3.3: 85.46,37.86 86.26,39.64
  rectangle net Vin: 124.9,40.61 126.33,44.69
  rectangle net Vin: 125.62,40.16 129.56,41.935

## Silkscreen, mask and mechanical layers (free items; w line width, h text height)
Top Overlay:
  circle w0.3: c138.63,50.33 r1.5
  circle w0.3: c71.64,50.32 r1.5
  circle w0.3: c71.64,38.661 r1.5
  circle w0.3: c138.63,38.65 r1.5
  lines w0.3: 70.15,38.67 70.15,50.27 ; 71.64,37.16 138.772,37.16 cw(c138.772,37.092) 138.82,37.14 ; 71.674,51.83 138.63,51.83 ; 140.13,38.65 140.13,50.33
  text "Linear Actuator V3.1 / github.com/ehsan2754" at 105.44,37.34 h0.7
Bottom Overlay:
  circle w0.3: c138.62,38.64 r1.5
  circle w0.3: c138.62,50.32 r1.5
  circle w0.3: c71.63,38.651 r1.5
  circle w0.3: c71.63,50.31 r1.5
  region: 114.914,43.545 cw(c114.928,47.845) 114.286,43.593 cw(c116.957,45.522) 113.738,46.219 ccw(c114.947,49.627) 114.343,46.062 ccw(c117.433,45.44)
  region: 116.639,50.118 116.758,50.762 ccw(c116.759,50.767) 116.765,50.767 ccw(c116.254,50.809) 115.741,50.809 ccw(c115.746,50.809) 115.741,50.809 ccw(c116.254,50.809) 115.741,50.799 115.741,50.809 cw(c116.254,50.809) 115.741,50.809 115.741,50.799 115.745,50.416 cw(c115.75,50.416) 115.745,50.416 ccw(c115.75,50.416) 115.748,50.411 116.632,50.114 ccw(c116.633,50.119)
  region: 112.855,48.099 ccw(c112.271,50.163) 113.621,48.496 113.621,47.54
  region: 116.11,43.711 cw(c114.928,47.845) 115.52,43.586 cw(c117.555,45.29) 115.001,46.012 ccw(c114.947,49.627) 115.619,46.074 ccw(c118.323,45.403)
  region: 113.339,43.85 cw(c114.928,47.845) 112.534,44.273 cw(c116.85,45.152) 112.748,46.757 ccw(c114.947,49.627) 113.24,46.439 ccw(c116.626,45.272)
  region: 116.702,46.191 ccw(c113.779,46.717) 114.349,49.633 cw(c112.271,50.163) 113.886,48.751 cw(c114.039,46.091)
  region: 116.59,43.88 ccw(c114.928,47.845) 117.453,44.364 ccw(c115.245,47.004) 116.933,50.003 cw(c114.346,47.076)
  region: 111.777,45.251 cw(c114.72,45.189) 112.318,46.89 ccw(c111.361,44.78) 109.683,46.377 cw(c109.759,44.009)
  region: 111.428,47.277 cw(c114.213,47.797) 115.113,50.483 ccw(c115.33,46.513)
  lines w0.01: 115.746,50.809 115.75,50.416 116.633,50.119 ; 115.749,50.759 cw(c116.254,50.809) 116.759,50.767 ; 122.511,50.338 122.639,51.028
  lines w0.127: 109.683,46.377 cw(c109.759,44.009) 111.777,45.251 cw(c114.72,45.189) 112.318,46.89 ccw(c111.361,44.78) 109.683,46.377 ; 111.428,47.277 cw(c114.213,47.797) 115.113,50.483 ccw(c115.33,46.513) 111.428,47.277 ; 112.534,44.273 cw(c116.85,45.152) 112.748,46.757 ccw(c114.947,49.627) 113.24,46.439 ccw(c116.626,45.272) 113.339,43.85 cw(c114.928,47.845) 112.534,44.273 ; 112.855,48.099 ccw(c112.271,50.163) 113.621,48.496 113.621,47.54 112.855,48.099 ; 113.738,46.219 ccw(c114.947,49.627) 114.343,46.062 ccw(c117.433,45.44) 114.914,43.545 cw(c114.928,47.845) 114.286,43.593 cw(c116.957,45.522) 113.738,46.219 ; 113.886,48.751 ccw(c112.271,50.163) 114.349,49.633 cw(c113.779,46.717) 116.702,46.191 ccw(c114.039,46.091) 113.886,48.751 ; 115.001,46.012 ccw(c114.947,49.627) 115.619,46.074 ccw(c118.323,45.403) 116.11,43.711 cw(c114.928,47.845) 115.52,43.586 cw(c117.555,45.29) 115.001,46.012 ; 116.59,43.88 ccw(c114.928,47.845) 117.453,44.364 ccw(c115.245,47.004) 116.933,50.003 cw(c114.346,47.076) 116.59,43.88
  lines w0.254: 85.575,43.381 ccw(c106.073,53.814) 89.564,37.8 ; 86.74,43.313 ccw(c106.073,53.814) 90.282,38.496 ; 87.068,44.879 ccw(c106.073,53.814) 92.534,37.761 ; 88.549,45.019 ccw(c105.568,53.467) 94.35,38.132 ; 89.001,46.428 ccw(c105.568,53.467) 93.854,39.8 ; 89.395,48.227 ccw(c105.568,53.467) 99.19,37.709 ; 89.771,50.486 ccw(c105.515,53.336) 121.355,51.075 ; 91.11,49.154 ccw(c105.515,53.336) 116.055,42.663 ; 91.779,50.632 ccw(c105.515,53.336) 114.679,42.752 ; 92.976,50.949 ccw(c105.756,53.335) 97.688,43.141 ; 94.056,50.666 ccw(c105.756,53.335) 97.958,44.214 ; 95.125,50.507 ccw(c105.756,53.335) 97.741,45.8 ; 96.032,50.999 ccw(c105.756,53.335) 97.803,47.272 ; 97.12,50.798 ccw(c105.756,53.335) 98.146,48.529 ; 98.006,51.351 ccw(c105.756,53.335) 98.77,49.435 ; 99.378,51.299 ccw(c106.076,53.335) 100.272,49.421 ; 101.038,51.109 ccw(c105.515,53.336) 109.569,50.408 ; 101.429,40.994 ccw(c105.515,53.336) 113.37,42.977 ; 102.789,42.679 ccw(c105.515,53.336) 111.546,44.136 ; 102.789,47.991 ccw(c105.515,53.336) 110.929,50.75 ; 102.999,43.657 ccw(c105.515,53.336) 110.944,44.938 ; 103.104,45.707 ccw(c105.515,53.336) 108.762,46.024 ; 103.287,51.477 ccw(c105.642,53.336) 107.47,50.957 ; 103.419,44.583 ccw(c105.515,53.336) 110.321,45.726 ; 103.452,41.514 ccw(c105.515,53.336) 111.689,43.046 ; 103.469,49.899 ccw(c105.515,53.336) 109.041,51.447 ; 104.118,46.476 ccw(c105.515,53.336) 109.429,47.532 ; 112.868,38.008 ccw(c105.515,53.336) 122.319,50.759 ; 116.17,38.828 ccw(c105.515,53.336) 123.368,51.043 ; 116.905,38.128 ccw(c105.515,53.336) 124.411,51.352 ; 118.967,38.011 ccw(c105.168,53.84) 125.988,51.096 ; 120.938,38.501 ccw(c105.168,53.84) 126.843,50.071 ; 121.455,37.6 ccw(c105.168,53.84) 128.002,51.084
  lines w0.3: 70.14,38.66 70.14,50.26 ; 71.63,37.15 138.762,37.15 cw(c138.762,37.082) 138.81,37.13 ; 71.664,51.82 138.62,51.82 ; 140.12,38.64 140.12,50.32
  text "GND / SWCLK / SWIO / +3.3v" at 86.99,48.979 h0.7 r90
  text "Linear Actuator V3.1 / github.com/ehsan2754" at 86.4,37.87 h0.7
  text "GND /  / Rx /  / Tx /  / M+ /  / M- /  / Vin" at 132.41,37.678 h0.65
Mechanical 2:
  lines w0.5: 68.64,49.52 68.64,39.461 ccw(c72.14,39.461) 72.14,35.961 ; 68.641,49.52 cw(c72.141,49.52) 72.14,53.02 138.13,53.02 ; 72.14,35.96 138.13,35.96 ; 138.13,35.95 ccw(c138.129,39.45) 141.629,39.45 ; 138.13,53.029 cw(c138.13,49.529) 141.63,49.53 ; 141.645,39.45 141.645,49.53